# EAGLE board M3 (SN755410) (EAGLE 6.2)
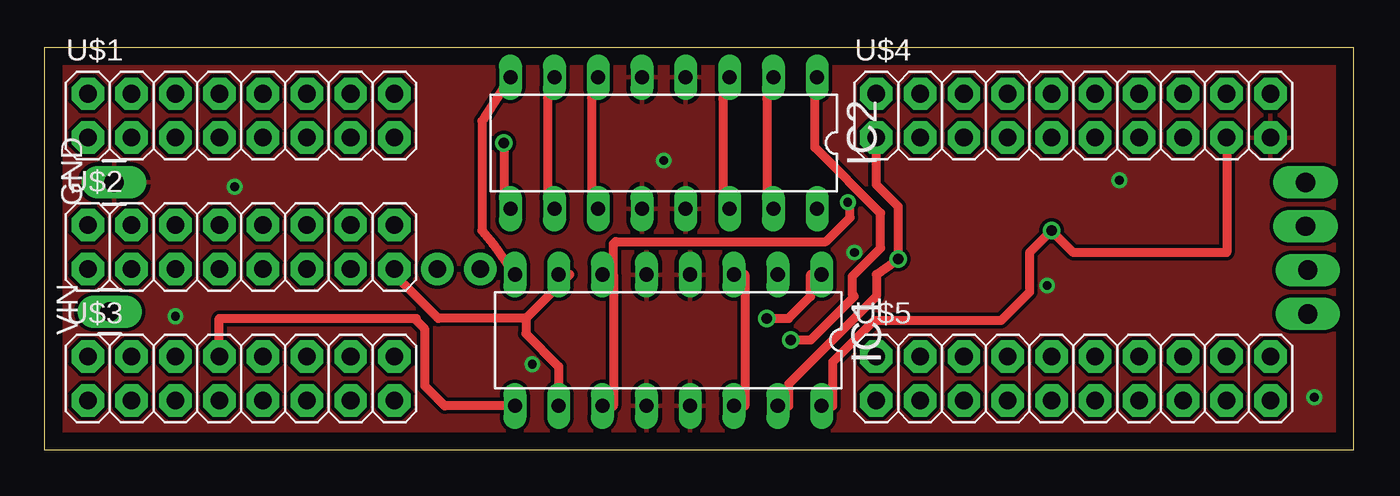
[diagram p0: board, top side]
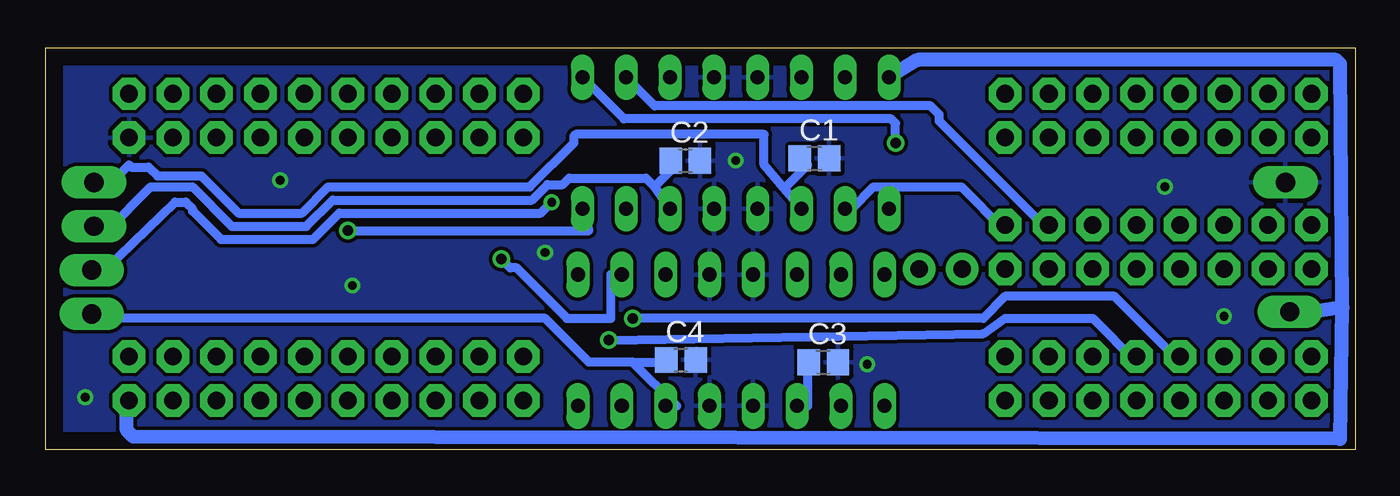
[diagram p1: board, bottom side, seen from below]

Size 75.95 x 23.32 mm. Coordinates in mm from the lower left corner, seen from the top.
Outline: 0,0 75.95,0 75.95,23.32 0,23.32 0,0
Copper layers (1*16): Top 0.035mm / dielectric 1.5mm / Bottom 0.035mm
Design rules: minimum track width 20mil, minimum drill 24mil, track to track 8mil, track to pad 8mil, pad to pad 8mil, via to via 8mil, smd to smd 8mil, copper to edge 40mil, drill to drill 8mil, minimum pad ring 10mil, minimum via ring 8mil, stop-mask expansion 4mil, vias tented up to drill 0mil, thermal gap 10mil

## Footprints (pad centres in the part's own frame; a part is rotated, then mirrored left to right if it is on the bottom)
C0805 = smd 1.3 x 1.5: 1 -0.85,0; 2 0.85,0
1X01_LONGPAD = drill 1.118 pad 1.88 long: 1 0,0
DIP16 = drill 0.813 long: 1 -10.16,-3.81; 2 -7.62,-3.81; 3 -5.08,-3.81; 4 -2.54,-3.81; 5 0,-3.81; 6 2.54,-3.81; 7 5.08,-3.81; 8 7.62,-3.81; 9 7.62,3.81; 10 5.08,3.81; 11 2.54,3.81; 12 0,3.81; 13 -2.54,3.81; 14 -5.08,3.81; 15 -7.62,3.81; 16 -10.16,3.81
1X01NS = drill 1.016 pad 1.88: 1 0,0
1X02_LONGPADS = drill 1.118 pad 1.88 long: 1 0,0; 2 2.54,0
2X8 = drill 1.016 pad 1.88 octagon: 1 0,0; 2 0,2.54; 3 2.54,0; 4 2.54,2.54; 5 5.08,0; 6 5.08,2.54; 7 7.62,0; 8 7.62,2.54; 9 10.16,0; 10 10.16,2.54; 11 12.7,0; 12 12.7,2.54; 13 15.24,0; 14 15.24,2.54; 15 17.78,0; 16 17.78,2.54
2X10 = drill 1.016 pad 1.88 octagon: 1 -11.43,-1.27; 2 -11.43,1.27; 3 -8.89,-1.27; 4 -8.89,1.27; 5 -6.35,-1.27; 6 -6.35,1.27; 7 -3.81,-1.27; 8 -3.81,1.27; 9 -1.27,-1.27; 10 -1.27,1.27; 11 1.27,-1.27; 12 1.27,1.27; 13 3.81,-1.27; 14 3.81,1.27; 15 6.35,-1.27; 16 6.35,1.27; 17 8.89,-1.27; 18 8.89,1.27; 19 11.43,-1.27; 20 11.43,1.27

## Placement (x,y rotation side)
C1  0.1uf  [C0805]  31.37,16.89 0 bottom
C2  0.1uf  [C0805]  38.86,16.76 0 bottom
C3  0.1uf  [C0805]  30.86,5.08 0 bottom
C4  0.1uf  [C0805]  39.12,5.21 0 bottom
GND  M01PTH_LONGPAD  [1X01_LONGPAD]  4.06,15.49 90 top
IC1  SN754410  [DIP16]  34.92,6.35 180 top
IC2  SN754410  [DIP16]  34.67,17.78 180 top
JP1  M01SMDNS  [1X01NS]  22.81,10.49 0 top
JP2  M01SMDNS  [1X01NS]  25.3,10.49 0 top
MOTA  [1X02_LONGPADS]  73.28,10.41 270 top
MOTB  [1X02_LONGPADS]  73.15,15.49 270 top
U$1  M08X2  [2X8]  2.54,18.1 0 top
U$2  M08X2  [2X8]  2.54,10.48 0 top
U$3  M08X2  [2X8]  2.54,2.86 0 top
U$4  M10X2  [2X10]  59.69,19.37 0 top
U$5  M10X2  [2X10]  59.69,4.13 0 top
VIN  M01PTH_LONGPAD  [1X01_LONGPAD]  3.81,8 90 top

## Library data of the parts
C1-C4 = resistor
GND JP1 JP2 MOTA MOTB U$1-U$5 VIN = SparkFun
IC1 IC2 = HBridge

## Nets
5V: IC1.16 IC2.16 U$4.17
AMA: C4.1 IC1.3 IC1.14 MOTA.2
AMB: C3.1 IC1.6 IC1.11 MOTA.1
APWM: IC1.1 IC1.9 U$3.8
ASIGA: IC1.2 IC1.15 U$4.1
ASIGB: IC1.7 IC1.10 U$2.15
BMA: C2.1 IC2.3 IC2.14 MOTB.2
BMB: C1.1 IC2.6 IC2.11 MOTB.1
BPWM: IC2.1 IC2.9 U$3.10
BSIGA: IC2.2 IC2.15 U$2.14
BSIGB: IC2.7 IC2.10 U$2.16
GND: C1.2 C2.2 C3.2 C4.2 GND.1 IC1.4 IC1.5 IC1.12 IC1.13 IC2.4 IC2.5 IC2.12 IC2.13 U$4.19
VIN: IC1.8 IC2.8 U$5.19 VIN.1

## Tracks (layer width: path | path; a pad name or v marks a point on that pad's centre or on a via)
5V  (via drill 0.61)
  Top 0.508: IC1.16 45.72,2.54 45.72,5.08 48.13,7.49 55.5,7.49 57.15,9.14 57.15,11.43 v58.42,12.7 59.69,11.43 68.58,11.43 U$4.17
  Bottom 0.508: v58.42,12.7 44.45,12.7 IC2.16
AMA
  Top 0.508: IC1.14 40.64,2.54 40.64,10.16 IC1.3
  Bottom 0.508: 41.91,5.08 44.45,5.08 46.99,7.62 72.39,7.62 MOTA.2 | 41.91,5.08 39.37,2.54 IC1.14 | 41.91,5.08 40.09,5.08 C4.1
AMB  (via drill 0.51)
  Top 0.508: 33.02,10.16 33.02,2.54 IC1.11 | 33.02,10.16 IC1.6 | 33.02,10.16 33.02,11.94 33.15,12.06 45.34,12.06 46.74,13.46 46.74,14.22 v46.61,14.35
  Bottom 0.508: MOTA.1 72.52,10.41 68.45,14.35 67.82,14.35 67.44,13.97 67.44,13.84 65.79,12.19 60.45,12.19 58.93,13.72 47.24,13.72 v46.61,14.35 | C3.1 31.75,5.08 31.75,2.54 IC1.11
APWM  (via drill 0.61)
  Top 0.508: 21.46,7.62 10.16,7.62 U$3.8 10.16,5.08 | 21.46,7.62 21.59,7.62 | v41.91,7.62 43.18,7.62 44.45,8.89 44.45,10.16 IC1.1 | IC1.9 23.24,2.54 22.1,3.68 22.1,6.99 21.46,7.62
  Bottom 0.508: v41.91,7.62 21.59,7.62 20.32,8.89 13.97,8.89 10.16,5.08 U$3.8
ASIGA  (via drill 0.61)
  Top 0.508: IC1.15 43.18,2.54 43.18,3.81 48.26,8.89 48.26,10.16 v49.53,11.05 49.53,14.1 48.26,15.37 U$4.1 48.26,17.78
  Bottom 0.508: IC1.2 43.18,10.16 43.18,7.62 45.72,7.62 48.64,10.54 49.02,10.54 v49.53,11.05
ASIGB
  Top 0.508: 27.94,7.62 30.48,10.16 IC1.7 | 27.94,7.62 22.86,7.62 20.32,10.16 U$2.15 | 27.94,7.62 27.94,6.73 29.84,4.83 IC1.10
BMA
  Top 0.508: IC2.14 39.37,13.97 39.37,20.32 IC2.3
  Bottom 0.508: 40.64,15.24 IC2.14 39.37,13.97 | MOTB.2 72.39,12.7 69.85,15.24 67.44,15.24 65.15,12.95 60.83,12.95 59.31,14.48 47.75,14.48 46.86,15.37 45.97,15.37 45.59,15.75 41.15,15.75 40.64,15.24 | 40.64,15.24 39.37,16.51 C2.1
BMB
  Top 0.508: IC2.11 31.75,13.97 31.75,20.32 IC2.6
  Bottom 0.508: 33.13,15.15 IC2.11 31.75,13.97 | 33.13,15.15 34.29,16.51 34.29,18.29 45.21,18.29 45.34,18.16 45.34,17.78 47.88,15.24 59.56,15.24 61.09,13.72 64.77,13.72 66.93,15.88 69.47,15.88 69.98,16.38 70.99,16.38 71.12,16.51 72.39,15.24 MOTB.1 | C1.1 31.75,16.51 33.02,15.24 33.13,15.15
BPWM  (via drill 0.61)
  Top 0.508: v26.67,17.78 26.67,13.97 IC2.9 | v43.31,6.35 44.45,6.35 46.99,8.89 46.86,9.02 46.86,10.03 48.51,11.68 48.51,13.72 44.7,17.53 44.7,21.46 IC2.1
  Bottom 0.508: v43.31,6.35 21.59,6.73 20.32,7.62 15.24,7.62 12.7,5.08 U$3.10 | v26.67,17.78 26.67,18.92 26.92,19.18 42.42,19.18 IC2.1
BSIGA
  Top 0.508: IC2.15 41.91,13.97 41.91,20.32 IC2.2
  Bottom 0.508: U$2.14 17.78,12.7 24.13,19.05 24.13,19.43 24.64,19.94 40.64,19.94 IC2.2
BSIGB
  Top 0.508: IC2.10 29.21,13.97 29.21,20.32 IC2.7
  Bottom 0.508: U$2.16 20.32,12.7 22.86,15.24 27.94,15.24 29.21,13.97 IC2.10
GND  (via drill 0.51)
  other vias: 46.99,11.43 11.05,15.24 7.62,7.75 28.32,4.95 58.17,9.53 73.66,3.05 35.94,16.76 62.36,15.62
  pour Top: 0.64,0.51 0.89,0.25 74.93,0.25 75.18,0.51 75.18,22.73 74.93,23.37 0.76,22.61
  pour Bottom: 0.64,22.61 0.64,0.25 74.93,0.25 75.44,0.76 75.44,22.35 75.82,23.5 1.78,23.5
VIN
  Top 0.508: IC2.8 25.4,19.05 25.4,12.7 26.04,11.94 IC1.8
  Bottom 0.508: U$5.19 71.12,2.54 71.25,2.54
  Bottom 0.813: 71.25,2.92 71.25,2.54 71.25,1.14 70.87,0.76 0.89,0.64 0.76,8.26 | 0.76,8.26 0.89,22.35 1.14,22.61 25.4,22.61 IC2.8 | 0.76,8.26 2.41,8 VIN.1